# EAGLE board Input interface (EAGLE 8.6.0)
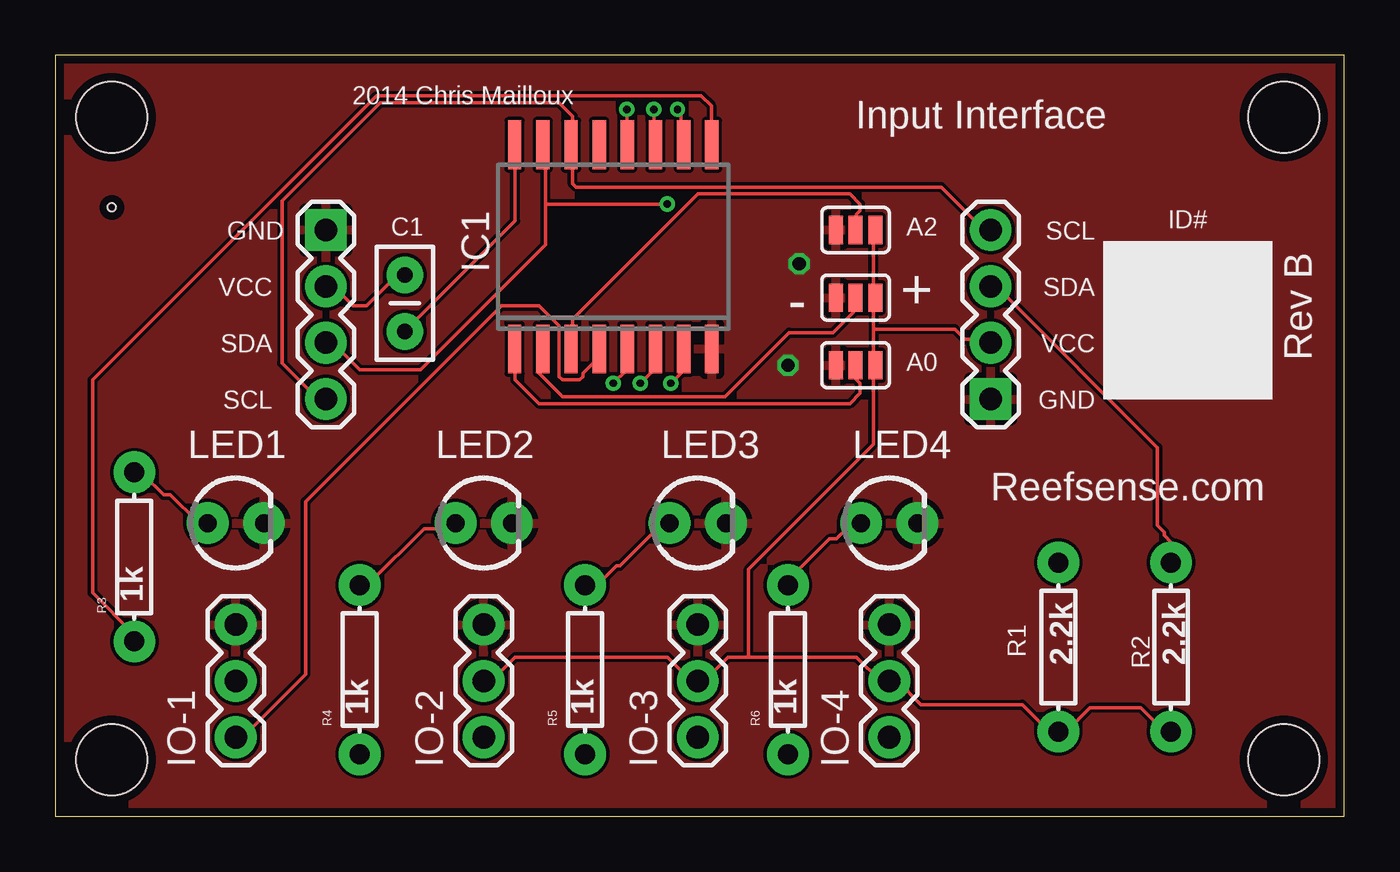
[diagram p0: board, top side]
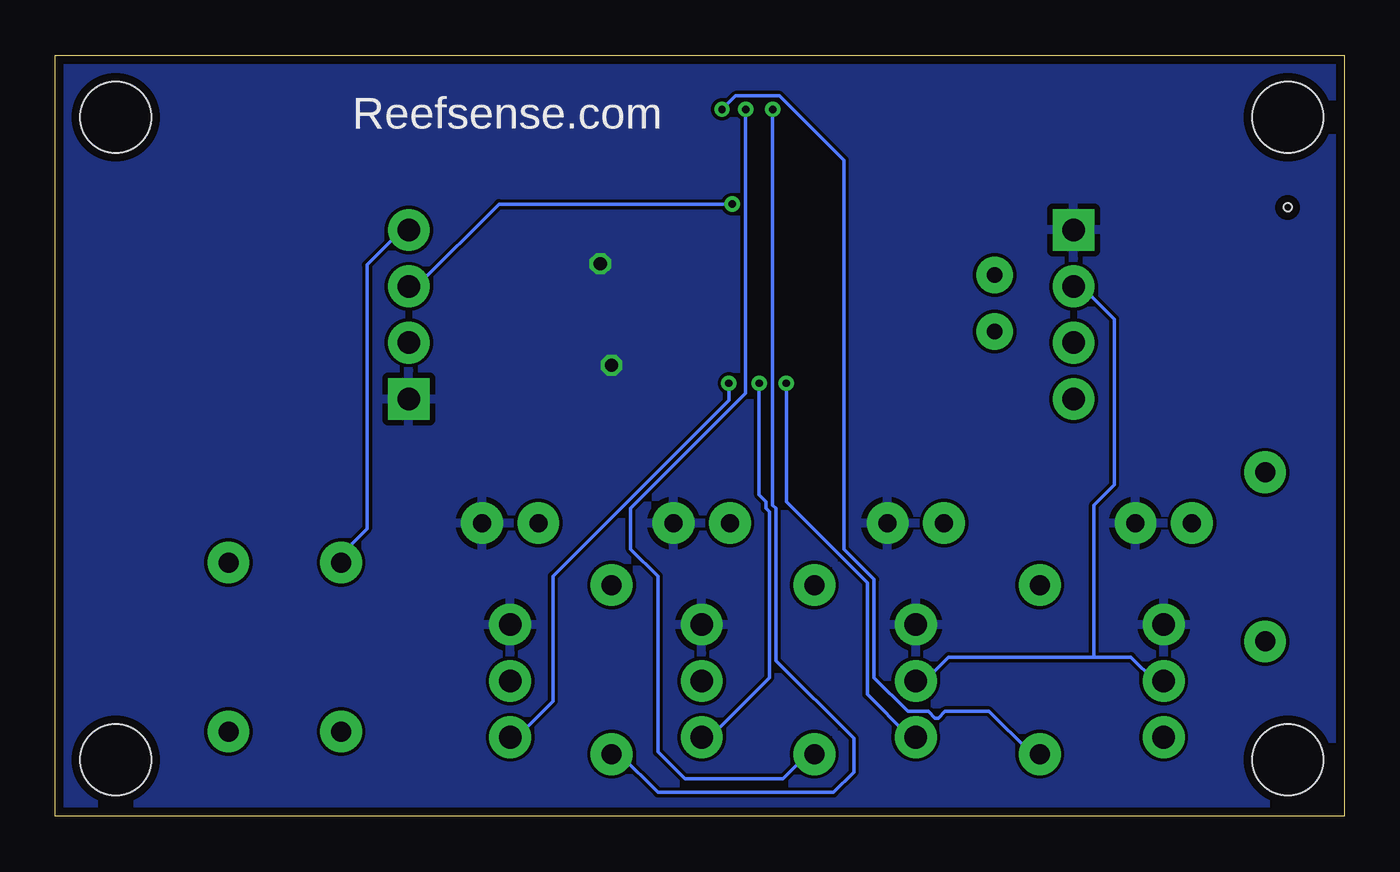
[diagram p1: board, bottom side, seen from below]

Size 58.09 x 34.28 mm. Coordinates in mm from the lower left corner, seen from the top.
Outline: 0,0 58.09,0 58.09,34.28 0,34.28 0,0
Copper layers (1*16): Top 0.0356mm / dielectric 1.5011mm / Bottom 0.0356mm
Design rules "LaenPCBOrder": minimum track width 6mil, minimum drill 13mil, track to track 6mil, track to pad 6mil, pad to pad 6mil, via to via 6mil, smd to smd 6mil, copper to edge 15mil, drill to drill 6mil, minimum pad ring 7mil, minimum via ring 7mil, stop-mask expansion 3mil, vias tented up to drill 0mil, thermal gap 10mil
Holes 3.2 mm at 2.54,31.5 55.37,31.5 55.37,2.54 2.54,2.54
Holes 0.35 mm at 2.54,27.43

## Footprints (pad centres in the part's own frame; a part is rotated, then mirrored left to right if it is on the bottom)
SJ_3 = smd 0.635 x 1.27: 1 -0.889,0; 2 0,0; 3 0.889,0
CAP-PTH-SMALL2 = drill 0.7 pad 1.651: 1 0,0; 2 2.54,0
SO16W = smd 0.6 x 2.2: 1 -4.445,-4.6; 2 -3.175,-4.6; 3 -1.905,-4.6; 4 -0.635,-4.6; 5 0.635,-4.6; 6 1.905,-4.6; 7 3.175,-4.6; 8 4.445,-4.6; 9 4.445,4.6; 10 3.175,4.6; 11 1.905,4.6; 12 0.635,4.6; 13 -0.635,4.6; 14 -1.905,4.6; 15 -3.175,4.6; 16 -4.445,4.6
1X03 = drill 1.016 pad 1.88: 1 0,0; 2 2.54,0; 3 5.08,0
1X04 = drill 1.016 pad 1.88 square: 1 0,0 | drill 1.016 pad 1.88: 2 2.54,0; 3 5.08,0; 4 7.62,0
LED3MM = drill 0.813 pad 1.88: A -1.27,0; K 1.27,0
AXIAL-0.3 = drill 0.9 pad 1.88: P$1 -3.81,0; P$2 3.81,0

## Placement (x,y rotation side)
A0  [SJ_3]  36.07,20.32 0 top
A1  [SJ_3]  36.07,23.37 0 top
A2  [SJ_3]  36.07,26.42 0 top
C1  [CAP-PTH-SMALL2]  15.75,24.38 270 top
IC1  PCF8574T  [SO16W]  25.15,25.65 0 top
IO-1  [1X03]  8.13,3.56 90 top
IO-2  [1X03]  19.3,3.56 90 top
IO-3  [1X03]  28.96,3.56 90 top
IO-4  [1X03]  37.59,3.56 90 top
JP1  [1X04]  12.19,26.42 270 top
JP2  [1X04]  42.16,18.8 90 top
LED1  [LED3MM]  8.13,13.21 0 top
LED2  [LED3MM]  19.3,13.21 0 top
LED3  [LED3MM]  28.96,13.21 0 top
LED4  [LED3MM]  37.59,13.21 0 top
R1  2.2k  [AXIAL-0.3]  45.21,7.62 270 top
R2  2.2k  [AXIAL-0.3]  50.29,7.62 270 top
R3  1k  [AXIAL-0.3]  3.56,11.68 90 top
R4  1k  [AXIAL-0.3]  13.72,6.6 90 top
R5  1k  [AXIAL-0.3]  23.88,6.6 90 top
R6  1k  [AXIAL-0.3]  33.02,6.6 90 top

## Library data of the parts
A0 A1 A2 = SparkFun-Retired
C1 = SparkFun-Capacitors
IC1 = micro-philips
IO-1-IO-4 JP1 JP2 = SparkFun-Connectors
LED1-LED4 = SparkFun-LED
R1-R6 = SparkFun-Resistors

## Nets
5V: A0.3 A1.3 A2.3 C1.1 IO-1.2 IO-2.2 IO-3.2 IO-4.2 JP1.2 JP2.2 R1.P$2 R2.P$2
GND: A0.1 A1.1 A2.1 IC1.8 IO-1.3 IO-2.3 IO-3.3 IO-4.3 JP1.1 JP2.1 LED1.K LED2.K LED3.K LED4.K
N$1: IC1.4 IO-1.1
N$2: IC1.5 IO-2.1
N$3: IC1.6 IO-3.1
N$4: A0.2 IC1.1
N$5: IC1.14 JP1.4 JP2.4 R1.P$1
N$6: IC1.15 JP1.3 JP2.3 R2.P$1
N$7: A1.2 IC1.2
N$8: C1.2 IC1.16
N$9: A2.2 IC1.3
N$10: IC1.7 IO-4.1
N$11: IC1.9 R3.P$1
N$12: IC1.10 R4.P$1
N$13: IC1.11 R5.P$1
N$14: IC1.12 R6.P$1
N$15: LED4.A R6.P$2
N$16: LED3.A R5.P$2
N$17: LED2.A R4.P$2
N$18: LED1.A R3.P$2

## Tracks (layer width: path | path; a pad name or v marks a point on that pad's centre or on a via)
5V
  Top 0.152: C1.1 15.39,24.38 14.02,23.01 13.41,23.01 12.65,23.77 12.19,23.77 JP1.2 | 36.88,21.95 36.88,23.32 A1.3 36.88,23.47 36.88,26.36 A2.3 | 36.88,21.95 36.88,20.42 A0.3 36.88,20.27 36.88,16.76 31.24,11.12 31.24,7.16 | 36.88,21.95 40.54,21.95 41,21.49 41.91,21.49 42.06,21.34 JP2.2 | R2.P$2 49.99,3.81 48.92,4.88 46.63,4.88 45.57,3.81 R1.P$2 44.81,3.81 43.59,5.03 39.01,5.03 37.95,6.1 IO-4.2 37.19,6.1 36.12,7.16 31.24,7.16 | 31.24,7.16 30.33,7.16 29.26,6.1 IO-3.2 28.65,6.1 27.58,7.16 20.73,7.16 19.66,6.1 IO-2.2
  Bottom 0.152: IO-1.2 8.53,6.1 9.6,7.16 11.28,7.16 | 11.28,7.16 17.83,7.16 18.9,6.1 IO-2.2 | 11.28,7.16 11.28,14.02 10.36,14.94 10.36,22.4 11.73,23.77 12.19,23.77 JP1.2
GND  (via drill 0.6)
  other vias: 33.53,24.89 33.02,20.32
  pour Top: -3.56,44.2 57.91,44.2 58.42,-1.52 -2.54,-1.02
  pour Bottom: -2.03,-1.02 58.42,-1.02 57.91,43.18 -4.06,42.67
N$1
  Top 0.152: IC1.4 24.38,21.03 24.38,20.57 23.77,19.96 23.77,19.81 23.62,19.66 22.86,19.66 22.71,19.81 22.71,22.1 21.79,23.01 20.12,23.01 11.28,14.17 11.28,6.4 8.53,3.66 8.23,3.66 IO-1.1
N$2  (via drill 0.33)
  Top 0.152: v25.15,19.51 25.76,20.12 25.76,21.03 IC1.5
  Bottom 0.152: v25.15,19.51 25.15,14.17 21.49,10.52 21.49,5.49 19.66,3.66 19.36,3.66 IO-2.1
N$3  (via drill 0.33)
  Top 0.152: v26.36,19.51 26.98,20.12 26.98,21.03 IC1.6
  Bottom 0.152: v26.36,19.51 26.36,14.48 26.06,14.17 26.06,13.87 25.91,13.72 25.91,6.25 28.5,3.66 28.96,3.66 IO-3.1
N$4
  Top 0.152: A0.2 36.12,20.27 36.12,19.66 36.27,19.51 36.27,19.05 35.81,18.59 21.79,18.59 20.73,19.66 20.73,21.03 IC1.1
N$5
  Top 0.152: JP2.4 42.06,26.52 41.76,26.52 39.93,28.35 23.47,28.35 23.32,28.5 23.32,30.18 IC1.14 23.32,30.33 23.32,31.55 22.71,32.16 14.63,32.16 10.21,27.74 10.21,20.42 11.73,18.9 12.19,18.9 JP1.4
  Bottom 0.152: R1.P$1 45.11,11.43 45.11,11.89 44.04,12.95 44.04,24.84 42.52,26.36 42.22,26.36 JP2.4
N$6  (via drill 0.33)
  Top 0.152: 22.1,27.58 22.1,25.76 16.46,20.12 13.72,20.12 12.5,21.34 JP1.3 | 22.1,27.58 22.1,30.18 IC1.15 | R2.P$1 50.29,12.34 49.99,12.65 49.99,12.8 49.68,13.11 49.68,16.61 42.52,23.77 42.22,23.77 JP2.3 | v27.58,27.58 22.1,27.58
  Bottom 0.152: v27.58,27.58 38.1,27.58 41.76,23.93 42.06,23.93 JP2.3
N$7
  Top 0.152: A1.2 35.97,23.32 35.97,22.71 35.05,21.79 33.07,21.79 30.18,18.9 22.86,18.9 21.79,19.96 21.79,20.88 21.95,21.03 IC1.2
N$8
  Top 0.152: C1.2 20.73,26.82 20.73,30.18 IC1.16
N$9
  Top 0.152: A2.2 36.12,26.52 36.12,27.13 36.27,27.28 36.27,27.58 35.81,28.04 28.96,28.04 23.32,22.4 23.32,21.18 IC1.3
N$10  (via drill 0.33)
  Top 0.152: v27.74,19.51 28.19,19.96 28.19,21.03 IC1.7
  Bottom 0.152: v27.74,19.51 27.74,18.75 35.66,10.82 35.66,5.18 37.19,3.66 37.49,3.66 IO-4.1
N$11
  Top 0.152: IC1.9 29.57,30.33 29.57,32 29.11,32.46 14.48,32.46 1.68,19.66 1.68,10.06 3.5,8.23 3.5,7.92 R3.P$1
N$12  (via drill 0.33)
  Top 0.152: v28.04,31.85 28.19,31.7 28.19,30.33 IC1.10
  Bottom 0.152: v28.04,31.85 27.43,32.46 25.45,32.46 22.55,29.57 22.55,12.04 21.18,10.67 21.18,6.25 19.66,4.72 18.75,4.72 18.44,4.42 18.29,4.42 17.98,4.72 16,4.72 14.17,2.9 13.72,2.9 R4.P$1
N$13  (via drill 0.33)
  Top 0.152: v26.98,31.85 26.98,30.33 IC1.11
  Bottom 0.152: v26.98,31.85 26.98,19.05 32.16,13.87 32.16,12.04 30.94,10.82 30.94,2.9 29.72,1.68 25.3,1.68 24.23,2.74 23.93,2.74 R5.P$1
N$14  (via drill 0.33)
  Top 0.152: v25.76,31.85 25.76,30.33 IC1.12
  Bottom 0.152: v25.76,31.85 25.76,14.02 25.6,13.87 25.6,7.01 22.1,3.5 22.1,1.98 23.01,1.07 30.94,1.07 32.61,2.74 32.92,2.74 R6.P$1
N$15
  Top 0.152: R6.P$2 33.07,10.52 33.53,10.97 33.53,11.12 34.9,12.5 35.2,12.5 35.81,13.11 36.27,13.11 LED4.A
N$16
  Top 0.152: R5.P$2 23.93,10.52 24.54,10.52 25.3,11.28 25.45,11.28 27.28,13.11 27.58,13.11 LED3.A
N$17
  Top 0.152: R4.P$2 13.72,10.52 14.17,10.52 16.61,12.95 17.83,12.95 17.98,13.11 LED2.A
N$18
  Top 0.152: LED1.A 6.86,13.26 6.4,13.26 5.18,14.48 4.88,14.48 3.96,15.39 3.66,15.39 R3.P$2

## Text on the board
tNames: 2014 Chris Mailloux | Input Interface | GND | SCL | ID# | Rev B | VCC | SDA | + | SDA | - | VCC | SCL | GND | Reefsense.com
bNames: Reefsense.com